# Altium PCB PCB1.PcbDoc
Units mm, origin at the board's own origin, x right, y up, seen from the top; angles counter-clockwise.
Board outline 60 x 80 mm, 2 copper layers (Top Layer, Bottom Layer), stack 1.569 mm thick; 48 components, 28 nets, 168 pads, 605 vias.
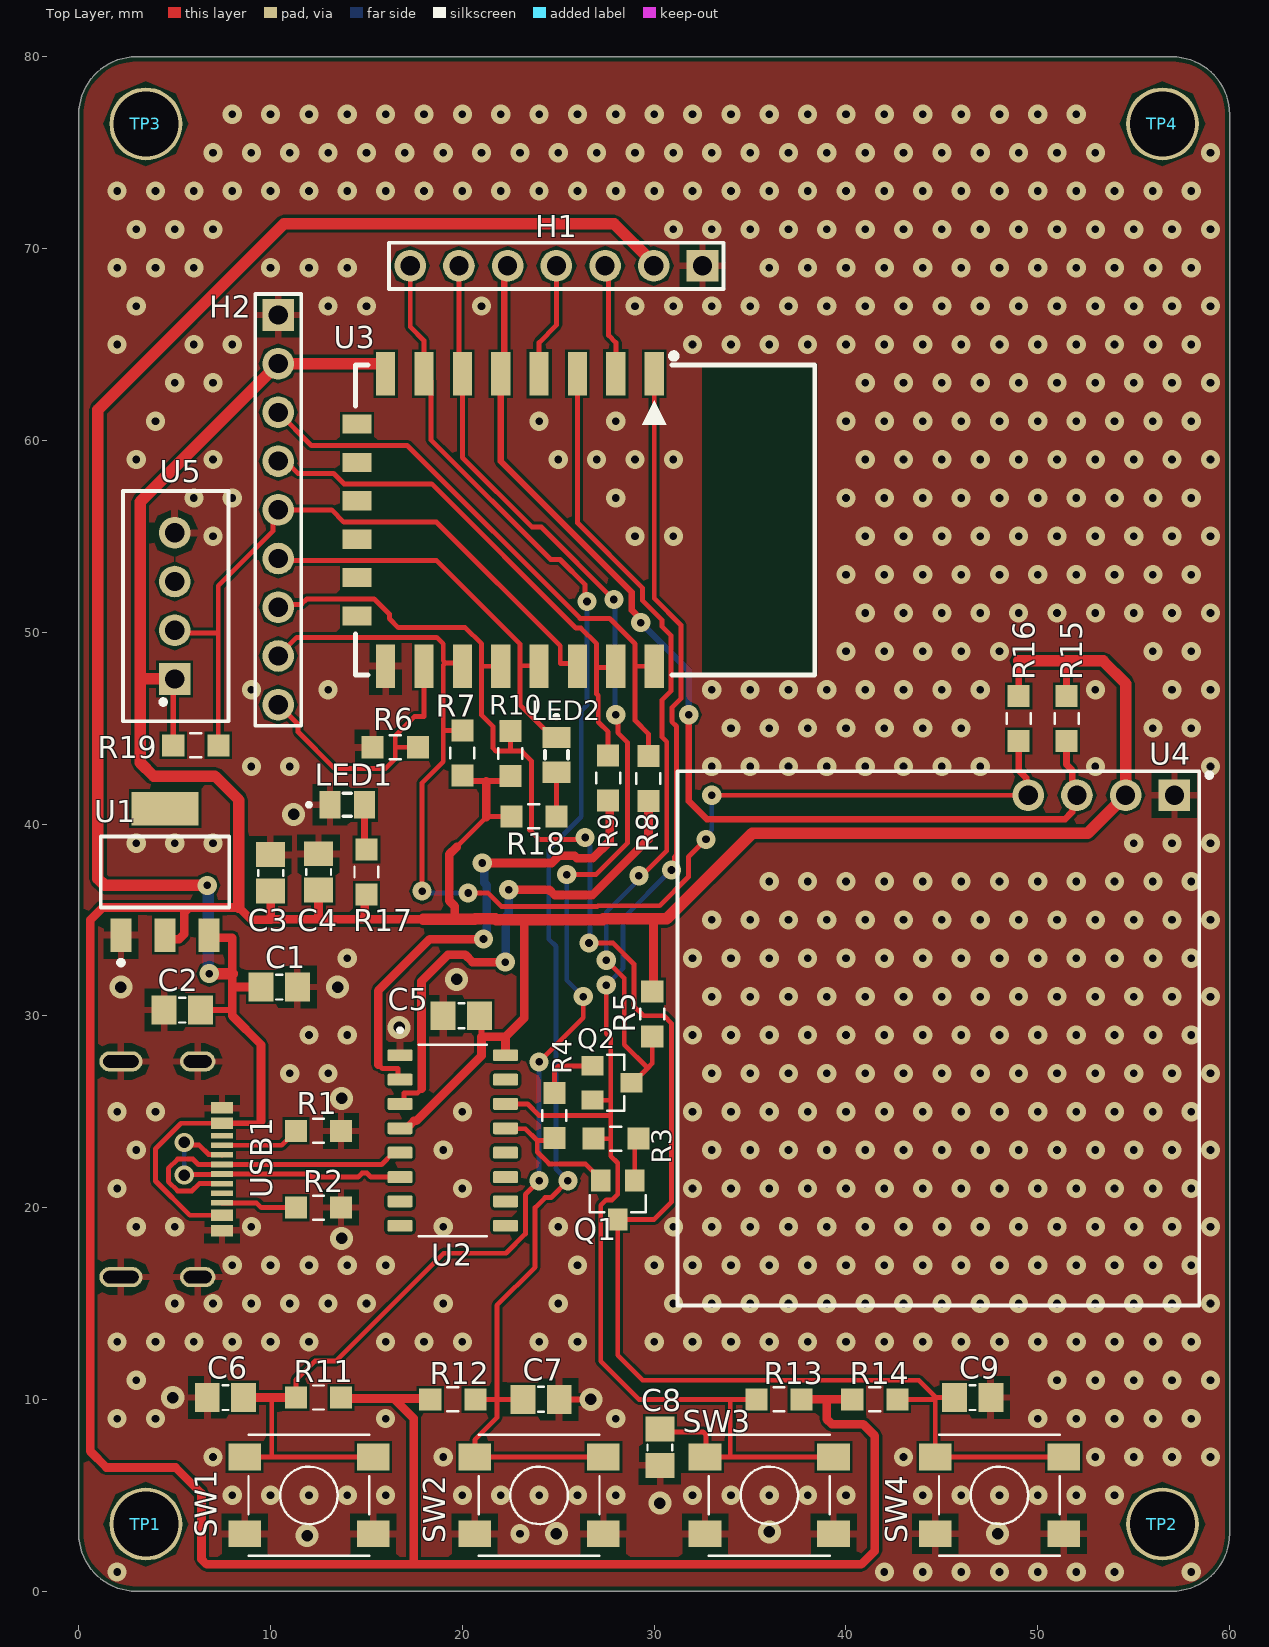
[diagram p0: Top Layer view]
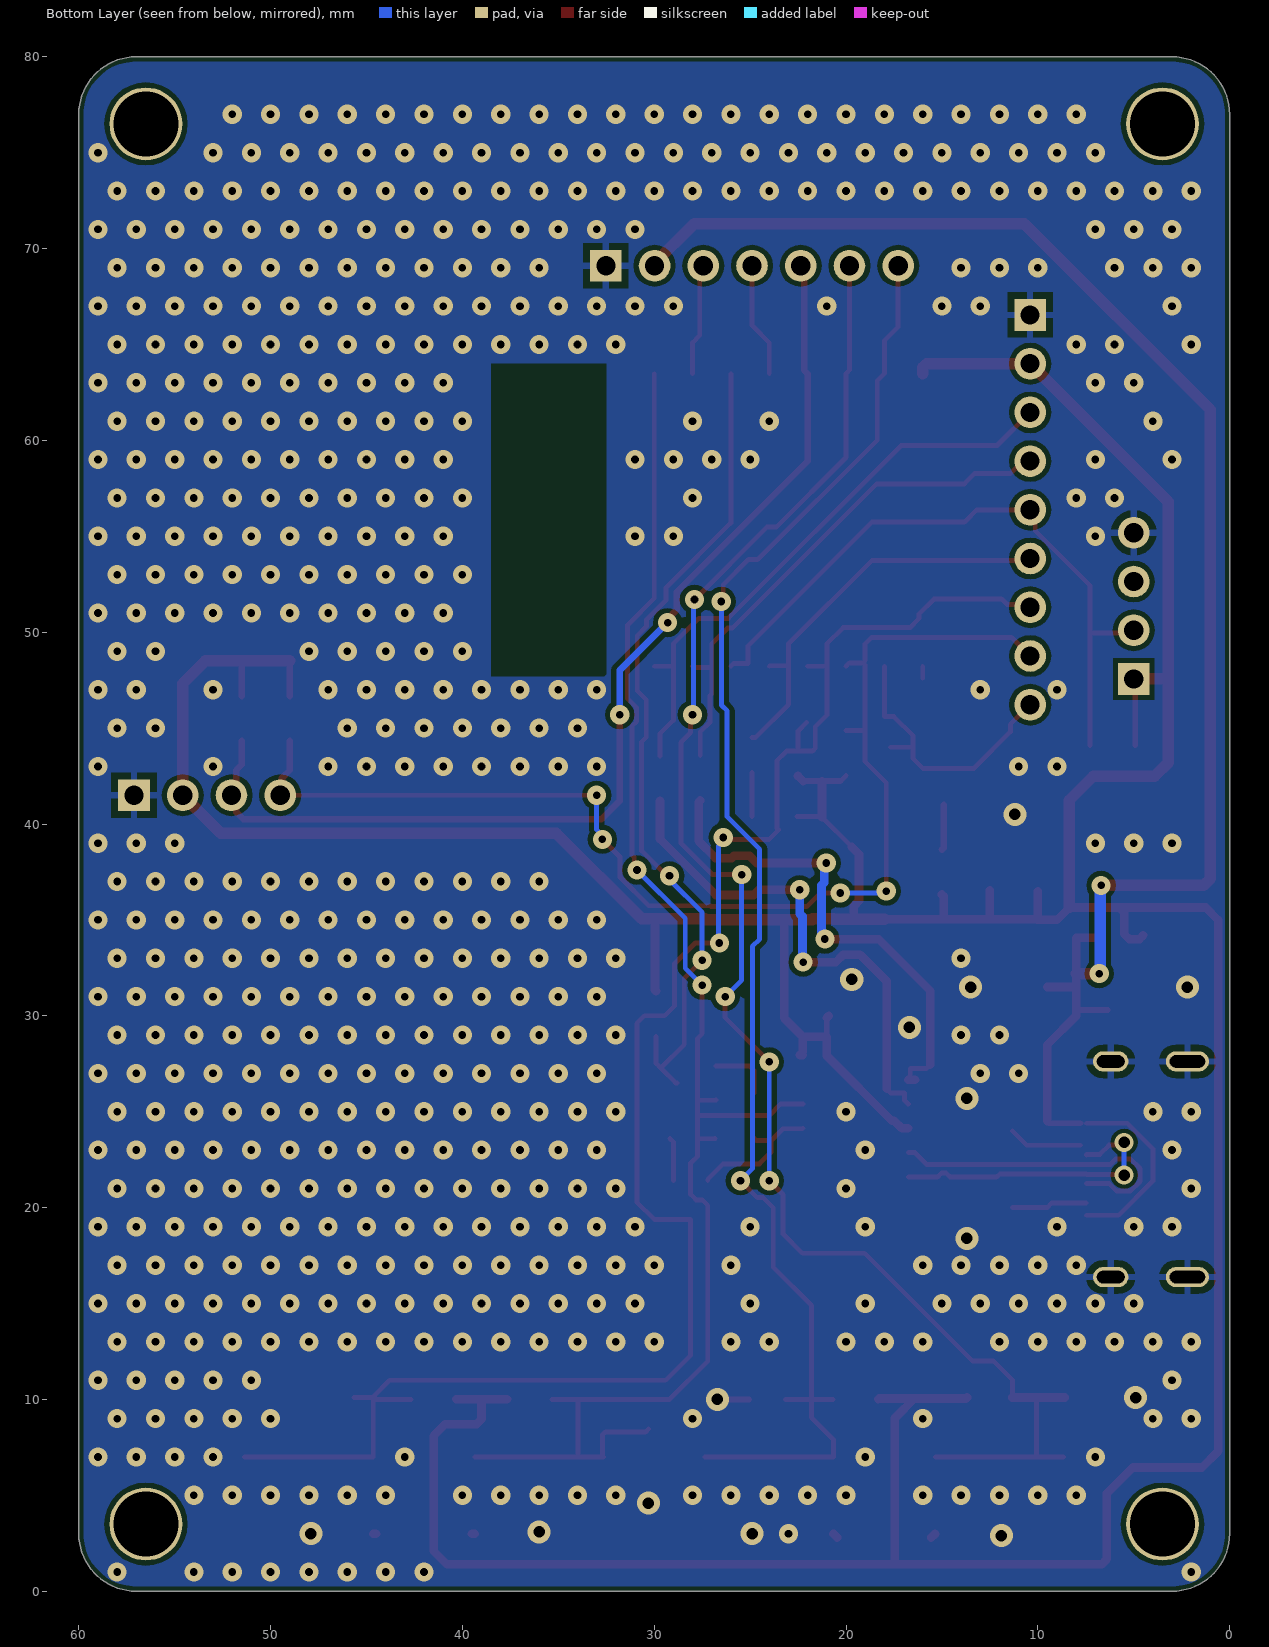
[diagram p1: Bottom Layer view, seen from below]

## Layer stack, top to bottom
Top Solder: solder mask 0.0254, SM-001, Dk 4
Top Layer: signal copper 0.035
Dielectric 1: core 1.4986, Core-043, Dk 4.3
Bottom Layer: signal copper 0.035
Bottom Solder: solder mask 0.0254, SM-001, Dk 4

## Board outline
0,3 ccw(c3,3) 3,0 57,0 ccw(c57,3) 60,3 60,77 ccw(c57,77) 57,80 3,80 ccw(c3,77) 0,77

## Design rules (kind name [scope] priority, off if disabled: settings)
AcuteAngle [All] p1: minimum=3.50000000000000E+0001 checktracksonly=FALSE
BoardOutlineClearance "BoardOutlineClearance 1" [All] p1: gap=0.25 ignorepadtopadclearanceinfootprint=FALSE except(0: Arc-SplitContinuation Track-SplitContinuation SMDPad-SplitContinuation THPad-SplitContinuation Via-SplitContinuation Fill-SplitContinuation Poly-SplitContinuation Region-SplitContinuation Text-SplitContinuation) // Milling
BoardOutlineClearance "BoardOutlineClearance 2" [All] p2: gap=0.4 ignorepadtopadclearanceinfootprint=FALSE except(0: Arc-SplitContinuation Track-SplitContinuation SMDPad-SplitContinuation THPad-SplitContinuation Via-SplitContinuation Fill-SplitContinuation Poly-SplitContinuation Region-SplitContinuation Text-SplitContinuation) // V-Cut
Clearance Room_USB [All] p1: gap=0.15 ignorepadtopadclearanceinfootprint=FALSE
Clearance "USB local clearances" [(InNet('NetR1_2') OR InNet('USB_D-') OR InNet('USB_D+') OR InNet('NetR6_2'))] p2 off: gap=0.2 ignorepadtopadclearanceinfootprint=TRUE
Clearance "Clearance 3 Oz" [All] p3 off: gap=0.35 ignorepadtopadclearanceinfootprint=TRUE except(0.25: Arc-Hole Track-Hole SMDPad-Hole THPad-Hole Via-Hole Fill-Hole Poly-Hole Region-Hole Text-Hole)
Clearance "Clearance 2 Oz" [All] p4 off: gap=0.3 ignorepadtopadclearanceinfootprint=TRUE except(0.25: Arc-Hole Track-Hole SMDPad-Hole THPad-Hole Via-Hole Fill-Hole Poly-Hole Region-Hole Text-Hole)
Clearance "Clearance-1 1 Oz" [All] p5: gap=0.254 ignorepadtopadclearanceinfootprint=TRUE // Standart
Clearance "Clearance-2 1 Oz" [All] p6 off: gap=0.15 ignorepadtopadclearanceinfootprint=TRUE except(0.2: Arc-Fill Arc-Poly Track-Fill Track-Poly SMDPad-Fill SMDPad-Poly THPad-Fill THPad-Poly Via-Fill Via-Poly Fill-Fill Fill-Poly Poly-Poly; 0.25: Arc-Hole Track-Hole SMDPad-Hole THPad-Hole Via-Hole Fill-Hole Poly-Hole Region-Hole Text-Hole) // Advance
Clearance "Clearance-1 1/2 Oz" [All] p7 off: gap=0.125 ignorepadtopadclearanceinfootprint=FALSE except(0.2: Arc-Fill Arc-Poly Track-Fill Track-Poly SMDPad-SMDPad SMDPad-Fill SMDPad-Poly THPad-Fill THPad-Poly Via-Fill Via-Poly Fill-Fill Fill-Poly Poly-Poly Poly-Region Poly-Text; 0.25: Arc-Hole Track-Hole SMDPad-Hole THPad-Hole Via-Hole Fill-Hole Poly-Hole Region-Hole Text-Hole) // Standart
Clearance "Clearance-2 1/2 Oz" [All] p8 off: gap=0.1 ignorepadtopadclearanceinfootprint=FALSE except(0.15: Arc-Fill Arc-Poly Track-Fill Track-Poly SMDPad-SMDPad SMDPad-Fill SMDPad-Poly THPad-Fill THPad-Poly Via-Fill Via-Poly Fill-Fill Fill-Poly Poly-Poly Poly-Region Poly-Text; 0.25: Arc-Hole Track-Hole SMDPad-Hole THPad-Hole Via-Hole Fill-Hole Poly-Hole Region-Hole Text-Hole) // Advance
DiffPairsRouting "DiffPairsRouting 1 Oz" [All] p1: maxlimit=0.254 minlimit=0.2 mostfreqgap=0.254 toplayer_minwidth=0.2 toplayer_maxwidth=0.381 toplayer_prefwidth=0.381 bottomlayer_minwidth=0.2 bottomlayer_maxwidth=0.381 bottomlayer_prefwidth=0.381 maxuncoupledlength=12.7
DiffPairsRouting "DiffPairsRouting 1/2 Oz" [All] p2: maxlimit=0.254 minlimit=0.1 mostfreqgap=0.254 toplayer_minwidth=0.1 toplayer_maxwidth=0.381 toplayer_prefwidth=0.381 bottomlayer_minwidth=0.1 bottomlayer_maxwidth=0.381 bottomlayer_prefwidth=0.381 maxuncoupledlength=12.7
HoleSize "Minimum HoleSize" [IsPad] p1: absolutevalues=TRUE maxlimit=5.9 minlimit=0.6 maxpercent=80.000 minpercent=20.000
HoleSize "Minimum HoleSize VIA 1" [IsVia] p2: absolutevalues=TRUE maxlimit=5.9 minlimit=0.3 maxpercent=80.000 minpercent=20.000 // Standart
HoleSize "Minimum HoleSize VIA 2" [IsVia] p3: absolutevalues=TRUE maxlimit=5.9 minlimit=0.2 maxpercent=80.000 minpercent=20.000 // Advance
HoleToHoleClearance Hole2HoleClearance [All] p1: gap=0.25 allowstackedmicrovias=FALSE
MinimumAnnularRing "Minimum AR VIA Standart" [IsVia] p1: minimumring=0.15
MinimumAnnularRing "Minimum AR PAD Standart" [IsPAD] p2: minimumring=0.2
MinimumAnnularRing "Minimum AR VIA Advance" [IsVia] p3: minimumring=0.1
MinimumAnnularRing "Minimum AR PAD Advance" [IsPAD] p4: minimumring=0.15
MinimumSolderMaskSliver [HasFootprint('TE_2340901-1')] p1: minsoldermaskwidth=0.05
MinimumSolderMaskSliver "SolderMask Bridge Standart" [All] p2: minsoldermaskwidth=0.15 // All Masks
MinimumSolderMaskSliver "SolderMask Bridge Advance" [All] p3: minsoldermaskwidth=0.1 // Mask LDI
PlaneClearance "PlaneClearance 3 Oz" [All] p1: clearance=0.35
PlaneClearance "PlaneClearance 2 Oz" [All] p2: clearance=0.3
PlaneClearance "PlaneClearance 1 Oz" [All] p3: clearance=0.2
PlaneClearance "PlaneClearance-1 1/2 Oz" [All] p4: clearance=0.2 // Standart
PlaneClearance "PlaneClearance-2 1/2 Oz" [All] p5: clearance=0.15 // Advance
PlaneConnect "TermalConnect 3 Oz" [All] p1: planeconnectstyle=Relief reliefexpansion=0.2 reliefentries=4 reliefconductorwidth=0.35 reliefairgap=0.35 // Standart
PlaneConnect "TermalConnect 2 Oz" [All] p2: planeconnectstyle=Relief reliefexpansion=0.2 reliefentries=4 reliefconductorwidth=0.3 reliefairgap=0.3 // Standart
PlaneConnect "TermalConnect-1 1 Oz" [All] p3: planeconnectstyle=Relief reliefexpansion=0.2 reliefentries=4 reliefconductorwidth=0.2 reliefairgap=0.2 // Standart
PlaneConnect "TermalConnect-2 1 Oz" [All] p4: pad.planeconnectstyle=Relief pad.reliefexpansion=0.15 pad.reliefentries=4 pad.reliefconductorwidth=0.2 pad.reliefairgap=0.2 via.planeconnectstyle=Direct via.reliefexpansion=0.15 via.reliefentries=4 via.reliefconductorwidth=0.15 via.reliefairgap=0.15 // Advance
PlaneConnect "TermalConnect-1 1/2 Oz" [All] p5: planeconnectstyle=Relief reliefexpansion=0.2 reliefentries=4 reliefconductorwidth=0.2 reliefairgap=0.2 // Standart
PlaneConnect "TermalConnect-2 1/2 Oz" [All] p6: pad.planeconnectstyle=Relief pad.reliefexpansion=0.15 pad.reliefentries=4 pad.reliefconductorwidth=0.15 pad.reliefairgap=0.15 via.planeconnectstyle=Direct via.reliefexpansion=0.15 via.reliefentries=4 via.reliefconductorwidth=0.15 via.reliefairgap=0.15 // Advance
PolygonConnect "PolygonConnect 3 Oz" [All] p1: thpad.connectstyle=Relief thpad.reliefconductorwidth=0.35 thpad.reliefentries=4 thpad.polygonreliefangle="90 Angle" thpad.airgapwidth=0.35 smdpad.connectstyle=Relief smdpad.reliefconductorwidth=0.35 smdpad.reliefentries=4 smdpad.polygonreliefangle="90 Angle" smdpad.airgapwidth=0.35 via.connectstyle=Direct via.reliefconductorwidth=0.254 via.reliefentries=4 via.polygonreliefangle="90 Angle" via.airgapwidth=0.254
PolygonConnect "PolygonConnect 2 Oz" [All] p2: thpad.connectstyle=Relief thpad.reliefconductorwidth=0.3 thpad.reliefentries=4 thpad.polygonreliefangle="90 Angle" thpad.airgapwidth=0.3 smdpad.connectstyle=Relief smdpad.reliefconductorwidth=0.3 smdpad.reliefentries=4 smdpad.polygonreliefangle="90 Angle" smdpad.airgapwidth=0.3 via.connectstyle=Direct via.reliefconductorwidth=0.254 via.reliefentries=4 via.polygonreliefangle="90 Angle" via.airgapwidth=0.254
PolygonConnect "PolygonConnect-1 1 Oz" [All] p3: thpad.connectstyle=Relief thpad.reliefconductorwidth=0.2 thpad.reliefentries=4 thpad.polygonreliefangle="90 Angle" thpad.airgapwidth=0.2 smdpad.connectstyle=Relief smdpad.reliefconductorwidth=0.2 smdpad.reliefentries=4 smdpad.polygonreliefangle="90 Angle" smdpad.airgapwidth=0.2 via.connectstyle=Direct via.reliefconductorwidth=0.254 via.reliefentries=4 via.polygonreliefangle="90 Angle" via.airgapwidth=0.254 // Standart
PolygonConnect "PolygonConnect-2 1 Oz" [All] p4: thpad.connectstyle=Relief thpad.reliefconductorwidth=0.15 thpad.reliefentries=4 thpad.polygonreliefangle="90 Angle" thpad.airgapwidth=0.15 smdpad.connectstyle=Relief smdpad.reliefconductorwidth=0.15 smdpad.reliefentries=4 smdpad.polygonreliefangle="90 Angle" smdpad.airgapwidth=0.15 via.connectstyle=Direct via.reliefconductorwidth=0.254 via.reliefentries=4 via.polygonreliefangle="90 Angle" via.airgapwidth=0.254 // Advance
PolygonConnect "PolygonConnect-1 1/2 Oz" [All] p5: thpad.connectstyle=Relief thpad.reliefconductorwidth=0.15 thpad.reliefentries=4 thpad.polygonreliefangle="90 Angle" thpad.airgapwidth=0.2 smdpad.connectstyle=Relief smdpad.reliefconductorwidth=0.2 smdpad.reliefentries=4 smdpad.polygonreliefangle="90 Angle" smdpad.airgapwidth=0.2 via.connectstyle=Direct via.reliefconductorwidth=0.254 via.reliefentries=4 via.polygonreliefangle="90 Angle" via.airgapwidth=0.254 // Standart
PolygonConnect "PolygonConnect-2 1/2 Oz" [All] p6: thpad.connectstyle=Relief thpad.reliefconductorwidth=0.125 thpad.reliefentries=4 thpad.polygonreliefangle="90 Angle" thpad.airgapwidth=0.15 smdpad.connectstyle=Relief smdpad.reliefconductorwidth=0.125 smdpad.reliefentries=4 smdpad.polygonreliefangle="90 Angle" smdpad.airgapwidth=0.15 via.connectstyle=Direct via.reliefconductorwidth=0.254 via.reliefentries=4 via.polygonreliefangle="90 Angle" via.airgapwidth=0.254 // Advance
RoomDefinition R_USB_conn [All vs False] p1: confinementstyle=ConfineOut formatcopy=TRUE lockcomponents=FALSE outline 8.4,25.9 5.7,25.9 5.7,24.7 4.6,23.6 4.2,23.6 4.2,20.7 5.5,19.4 5.6,19.4 5.6,18.7 6.2,18.1 8.5,18.1 8.4,18.2 8.4,26
RoutingCorners [All] p1 off: cornerstyle=45-Degree minsetback=2.54 maxsetback=2.54
RoutingVias [All] p1: holewidth=0.6 width=1 viastyle="Through Hole" minholewidth=0.4 minwidth=0.7 maxholewidth=0.7 maxwidth=1.27
SilkToSilkClearance Silk2SilkClearance [All] p1 off: silktosilkclearance=0.15
SilkToSolderMaskClearance Silk2SolderMaskClearance [IsPad] p1 off: minsilkscreentomaskgap=0.15 clearancetoexposedcopper=TRUE
SolderMaskExpansion SolderMaskExpansion-1 [All] p1: expansion=0.05 istentingtop=FALSE // Standart
SolderMaskExpansion "SolderMaskExpansion LDI" [All] p2: expansion=0.025 istentingtop=FALSE // Advance
UnRoutedNet [All] p1: checkbadconnections=TRUE
Width "Width 2 Oz" [InNet('+3V3')] p1 off: maxlimit=1 minlimit=0.254 preferedwidth=0.45 minimp=50.000000 maximp=50.000000 favimp=50.000000 checkconnectedcopper=TRUE
Width "Width 3 Oz" [All] p2: maxlimit=1 minlimit=0.254 preferedwidth=0.35 minimp=50.000000 maximp=50.000000 favimp=50.000000 checkconnectedcopper=TRUE
Width "Width 1 Oz" [All] p3 off: maxlimit=10 minlimit=0.15 preferedwidth=0.2 checkconnectedcopper=TRUE
Width "Width 1/2 Oz" [All] p4 off: maxlimit=10 minlimit=0.1 preferedwidth=0.125 checkconnectedcopper=TRUE
20 further rules are at their usual default settings.

## Components (designator, comment, footprint, x,y, rotation, side; value= is the part's Value field where it differs from the comment)
C1 "10 uF" CAPC2012X135N 10.45,31.5 r0 top
C2 "0.1 uF" "CAPC2012X135N - duplicate" 5.4,30.3 r180 top
C3 "10 uF" CAPC2012X135N 10,37.45 r90 top
C4 "0.1 uF" "CAPC2012X135N - duplicate" 12.5,37.5 r90 top
C5 "0.1 uF" "CAPC2012X135N - duplicate" 19.95,30 r180 top
C6 "0.1 uF" "CAPC2012X135N - duplicate" 7.65,10.1 r180 top
C7 "0.1 uF" "CAPC2012X135N - duplicate" 24.1,10 r0 top
C8 "0.1 uF" "CAPC2012X135N - duplicate" 30.3,7.5 r270 top
C9 "0.1 uF" "CAPC2012X135N - duplicate" 46.6,10.1 r0 top
H1 "HDR 07" "HDR 07" 32.52,69.1 r180 top
H2 "HDR 09" "HDR 09" 10.4,66.54 r270 top
LED1 "Red" LEDC2012X70N 14,41 r0 top
LED2 "Green" LEDC2012X70N 24.9,43.6 r270 top
Q1 "S8050" SOT-23 28.1,20.4 r180 top
Q2 "S8050" SOT-23 27.8,26.5 r270 top
R1 "5.1k 5%" R0805 12.5,24 r180 top value=5.1K
R2 "5.1k 5%" R0805 12.5,20 r180 top value=5.1K
R3 "10k 5%" R0805 28,23.6 r0 top value=5.1K
R4 "10k 5%" R0805 24.8,24.8 r90 top value=5.1K
R5 "10k 5%" R0805 29.9,30.1 r90 top value=5.1K
R6 "10k" R0805 16.5,44 r0 top value=5.1K
R7 "10k" R0805 20,43.7 r90 top value=5.1K
R8 "300" R0805 29.7,42.375 r270 top
R9 "300" R0805 27.6,42.4 r270 top
R10 "10k" R0805 22.5,43.675 r90 top value=5.1K
R11 "10k 5%" R0805 12.5,10.1 r0 top value=5.1K
R12 "10k 5%" R0805 19.5,10 r180 top value=5.1K
R13 "10k 5%" R0805 36.5,10 r0 top value=5.1K
R14 "10k 5%" R0805 41.5,10 r180 top value=5.1K
R15 "4.7k" R0805 51.5,45.5 r90 top value=4.7K
R16 "4.7k" R0805 49,45.5 r90 top value=4.7K
R17 "470" R0805 15,37.5 r90 top
R18 "470" R0805 23.725,40.4 r0 top
R19 "4.7k" R0805 6.1,44.1 r180 top value=4.7K
SW1 "Tack switch" 430453025836 12,5 r180 top locked
SW2 "Tack switch" 430453025836 24,5 r180 top locked
SW3 "Tack switch" 430453025836 36,5 r180 top locked
SW4 "Tack switch" 430453025836 48,5 r180 top locked
TP1 "MH M3" MH_M3#1 65,-3 r0 top
TP2 "MH M3" MH_M3#2 55,2.5 r0 top
TP3 "MH M3" MH_M3#3 76,-3 r0 top
TP4 "MH M3" MH_M3#4 82,-3 r0 top
U1 "BL1117-33CX" SOT-223-2 4.5,37.5 r0 top
U2 "CH340C" SOIC127P600X180-16N 19.5,23.5 r0 top
U3 "ESP_12_F" ESP_12_F 30,63.85 r270 top locked
U4 "0.96' OLED" "0.96 OLED_temp" 57.12,41.5 r180 top locked
U5 "DHT11" DHT11 5,47.56 r90 top
USB1 "Type-C Conn" TE_2340901-1 2.2,22 r270 top

## Footprints (in the part's own frame and the unit in brackets; to place one, negate y for a bottom-side part, rotate by r counter-clockwise, add the part's x,y. Pads: shape width x height; smd on the part's side, far side on the other; paste and mask are expansions set on the pad)
"0.96 OLED_temp" [mm] "Some virtual OLED module"
  rect 1.65x1.65 hole 1 mask+0: 1(0,0)
  round 1.65 hole 1 mask+0: 2(2.54,0) 3(5.08,0) 4(7.62,0)
  silkscreen extent -1.94,-1.25 25.9,26.6
430453025836 [mm] "6*6mm washable vertical type, J-Bend SMD, height 2.5mm, salmon actuator, 360gf, T&R"
  rect 1.7x1.4 smd: 1(-3.35,2) 2(3.35,2) 3(-3.35,-2) 4(3.35,-2)
  silkscreen extent -3.15,-3.15 3.15,3.15, body extent -3.6,-3.1 3.6,3.1, height 2.5
CAPC2012X135N [mm]
  rect 1.3x1.5 smd: 1(-0.95,0) 2(0.95,0)
  silkscreen extent -0.15,-0.65 0.15,0.65, body extent -1,-0.63 1,0.63, height 0.72
"CAPC2012X135N - duplicate" [mm]
  rect 1.3x1.5 smd: 1(-0.95,0) 2(0.95,0)
  silkscreen extent -0.15,-0.65 0.15,0.65
DHT11 [mm] "Temp and humidity module"
  rect 1.65x1.65 hole 1 mask+0: 1(0,0)
  round 1.65 hole 1 mask+0: 2(2.54,0) 3(5.08,0) 4(7.62,0)
  silkscreen extent -2.2,-2.8 9.8,2.7
ESP_12_F [mm] "ESP-12 Wi-Fi Module by AI-Thinker"
  rect 2.25x1 smd: 1(0.375,0) 2(0.375,-2) 3(0.375,-4) 4(0.375,-6) 5(0.375,-8) 6(0.375,-10) 7(0.375,-12) 8(0.375,-14) 9(15.625,-14) 10(15.625,-12) 11(15.625,-10) 12(15.625,-8) 13(15.625,-6) 14(15.625,-4) 15(15.625,-2) 16(15.625,0)
  rect 1x1.5 smd: 17(3,-15.5) 18(5,-15.5) 19(7,-15.5) 20(9,-15.5) 21(11,-15.5) 22(13,-15.5)
  silkscreen extent -0.7,-15.57 16.08,8.37, body extent 0,-15.49 16,8.51, height 2.75
"HDR 07" [mm]
  rect 1.65x1.65 hole 1: 1(0,0)
  round 1.65 hole 1: 2(2.54,0) 3(5.08,0) 4(7.62,0) 5(10.16,0) 6(12.7,0) 7(15.24,0)
  silkscreen extent -1.1,-1.2 16.34,1.2
"HDR 09" [mm]
  rect 1.65x1.65 hole 1: 1(0,0)
  round 1.65 hole 1: 2(2.54,0) 3(5.08,0) 4(7.62,0) 5(10.16,0) 6(12.7,0) 7(15.24,0) 8(17.78,0) 9(20.32,0)
  silkscreen extent -1.1,-1.2 21.42,1.2
LEDC2012X70N [mm]
  rect 1.1x1.45 smd: A(0.9,0) C(-0.9,0)
  silkscreen extent -2.1,-0.6 0.2,0.6, body extent -1,-0.63 1,0.63, height 0.7
MH_M3#1 [mm] "Mounting hole for M3 screw"
  round 3.8 hole 3.4 unplated: TP(-61.5,6.5)
MH_M3#2 [mm] "Mounting hole for M3 screw"
  round 3.8 hole 3.4 unplated: TP(1.5,1)
MH_M3#3 [mm] "Mounting hole for M3 screw"
  round 3.8 hole 3.4 unplated: TP(-72.5,79.5)
MH_M3#4 [mm] "Mounting hole for M3 screw"
  round 3.8 hole 3.4 unplated: TP(-25.5,79.5)
R0805 [mm]
  rect 1.15x1.15 smd: 1(-1.175,0) 2(1.175,0)
  silkscreen extent -0.28,-0.63 0.28,0.63
SOIC127P600X180-16N [mm]
  rrect25% 1.31x0.62 smd: 1(-2.75,4.445) 2(-2.75,3.175) 3(-2.75,1.905) 4(-2.75,0.635) 5(-2.75,-0.635) 6(-2.75,-1.905) 7(-2.75,-3.175) 8(-2.75,-4.445) 9(2.75,-4.445) 10(2.75,-3.175) 11(2.75,-1.905) 12(2.75,-0.635) 13(2.75,0.635) 14(2.75,1.905) 15(2.75,3.175) 16(2.75,4.445)
  silkscreen extent -2.85,-5 1.78,5.85, body extent -3,-5 3,5, height 1.8
SOT-23 [mil]
  rect 40x45 smd: 1(-35,-40) 2(35,-40) 3(0,40)
  silkscreen extent -58,-10 58,25, body extent -57,-51 57,51, height 55
SOT-223-2 [mm] "SOT-223/SC-73; 4 Leads; Body 6.7 x 7.3 mm, inc. leads (LxW max)"
  rect 1.1x1.75 smd: 1(-2.3,-3.3) 2(0,-3.3) 3(2.3,-3.3)
  rect 3.5x1.75 smd: 4(0,3.3)
  silkscreen extent -3.35,-4.85 3.35,1.85, body extent -3.35,-3.7 3.35,3.5, height 1.85
TE_2340901-1 [mm]
  rect 0.6x1.15 smd: A1/B12(-3.2,5.275) A4/B9(-2.4,5.275) B1/A12(3.2,5.275) B4/AP(2.4,5.275)
  rect 0.3x1.15 smd: A5(-1.25,5.275) A6(-0.25,5.275) A7(0.25,5.275) A8(1.25,5.275) B5(1.75,5.275) B6(0.75,5.275) B7(-0.75,5.275) B8(-1.75,5.275)
  oval 1.05x1.85 hole 0.65 slot 1.45 at 90 deg: SH1(-5.62,4) SH2(5.62,4)
  oval 1.05x2.25 hole 0.65 slot 1.85 at 90 deg: SH3(-5.62,0) SH4(5.62,0)

## Part data
C1 C3: library part GRT21BR61C106KE01L, "SMD Capacitor X5R(EIA) with Capacitance: 10uF Tol. 10%. Rated Voltage: 16Vdc", Package="0805 Murata", Availability=Good, MF=Murata, MP=GRT21BR61C106KE01L, Price=None
C2 C4 C5 C6 C7 C8 C9: library part GCM21BR71H104KA37K, "SMD Capacitor X7R(EIA) with Capacitance: 0.10uF Tol. 10%. Rated Voltage: 50Vdc", Package="0805 Murata", MF=Murata, MP=GCM21BR71H104KA37K
H1: "TE conn, HDR 7 Assy, MOD II, TH 2.54 mm"
H2: "TE conn, HDR 9 Assy, MOD II, TH 2.54 mm"
LED1 LED2: library part 597-5111-402F, "SMD LED 0805 R SAMPLE STRIP"
Q1 Q2: library part SMD-TRANSISTORS-NPN-25V-500MW(SOT-23), "Bipolar (BJT) Transistor NPN 25 V 500 mA 150MHz 300 mW Surface Mount SOT-23", MF=UMW, MP=S8050
R1 R2: library part "R 5.1k 5%", Package=0805, Availability=Unavailable, Price=None
R3 R4 R5 R11 R12 R13 R14: Package=0805, Availability=Unavailable, Price=None
R6 R7 R10: library part "10k 5%", Package=0805, Availability=Unavailable, Price=None
R8 R9 R17 R18: "5%", Package=0805, Availability=Unavailable, Price=None
R15 R16 R19: library part "4.7k 5%", Package=0805, Availability=Unavailable, Price=None
SW1 SW2 SW3 SW4: "WS-TASV J-Bend SMD Tact Switch 6X6 mm", NoPins=04
TP1 TP2 TP3 TP4: "Mounting hole"
U1: library part BL1117-18CX
U2: "USB to serial chip CH340"
U3: "ESP-12F Wi-Fi Module by AI-Thinker"
U4: library part "0.96 OLED_temp"
USB1: "USB Type C 2.0 Conn"

## Via types
v1: diameter 1, hole 0.4, Top Layer to Bottom Layer, 589 vias
v2: diameter 1.2, hole 0.6, Top Layer to Bottom Layer, 14 vias
v3: diameter 1, hole 0.6, Top Layer to Bottom Layer, 2 vias

## Nets (pads, with @x,y where several pads share a name; then routed paths per layer and width w, separated by ;. In a path a pad name is that pad's centre, name@x,y a point inside that pad or via, vN(x,y) a via of type N, cw(c..) or ccw(c..) an arc to the next point about the centre after c; other vN are vias at no path point)
+3V3: C3.1 C4.1 C5.1 H2.2 R5.2 R7.1 R10.1 R11.2 R12.2 R13.2 R14.2 R15.2 R16.2 R17.1 R18.1 R19.2 U1.2 U2.4 U2.16 U3.8 U4.2 U5.1 | length 259.1
  Top Layer w0.254: 19.7,38.804 21.25,40.354 21.296,40.4 R18.1 ; R7.1 R7.1@20.289,42.236
  Top Layer w0.3: R19.2 4.925,47.485 U5.1 ; R7.1@20.289,42.236 21.25,42.236 R10.1@22.236,42.236 ; 21,28.911 C5.1@21,29.9
  Top Layer w0.35: R16.2 49,48.5 ; 51.47,48.5 51.5,48.47 R15.2
  Top Layer w0.45: U1.2 4.7,34 5.236,34 5.5,34.264 5.5,35.386 5.764,35.65 ; C3.1 10,35.029 ; C4.1 12.5,35.098 12.569,35.029 ; R11.2 13.725,10.05 16.426,10.05 ; R17.1 14.907,36.232 14.907,35.029 ; U2.4 17.095,24.135 17.48,24.52 17.598,24.52 21,27.922 21,28.911 22.25,28.911 ; 17.971,35.029 14.907,35.029 ; R12.2 18.275,10.05 16.426,10.05 ; 19.599,35.029 19.599,35.717 19.321,35.994 19.321,38.425 19.7,38.804 ; C5.1 C5.1@21,29.9 ; 21.25,40.354 21.25,42.236 ; R10.1@22.236,42.236 R10.1 ; U2.16 22.415,27.945 22.25,28.11 22.25,28.911 ; 23.19,35.013 23.204,35.013 23.218,35.027 23.218,29.879 22.25,28.911 ; R5.2 29.961,31.336 29.961,35.054 ; R13.2 39,10 ; R14.2 39,10 ; 5.764,35.65 1.25,35.65 0.6,35 0.6,28.04 0.596,28.036 0.596,7.3 1.446,6.45 5.05,6.45 6.4,5.1 6.4,1.664 6.664,1.4 17.457,1.4 ; 5.764,35.65 8.35,35.65 9,35 10.029,35 10,35.029 ; 10,35.029 12.569,35.029 ; 12.569,35.029 14.907,35.029 ; 16.426,10.05 17.457,9.019 17.457,1.4 ; 17.457,1.4 40.8,1.4 41.5,2.1 41.5,8.1 40.9,8.7 39.264,8.7 39,8.964 39,10
  Top Layer w0.6: U5.1 3.271,47.56 3.2,47.489 ; 8.35,35.65 8.35,41.25 7.1,42.5 3.9,42.5 3.2,43.2 3.2,47.489 ; U3.8 16,63.8 15.8,64 H2.2 3.2,56.8 3.2,47.489 ; 17.971,35.029 19.599,35.029 20.638,35.029 20.663,35.054 21.726,35.054 21.767,35.013 23.218,35.013 27.313,35.013 27.354,35.054 29.961,35.054 30.654,35.054 35.117,39.517 52.597,39.517 U4.2 54.58,47.32 53.4,48.5 51.47,48.5 49,48.5
+5: C1.1 C2.1 H1.2 U1.3 USB1.A4/B9 USB1.B4/AP | length 96.5
  Top Layer w0.254: USB1.B4/AP 5.788,19.6 4,21.388 4,23.07 5.33,24.4 USB1.A4/B9
  Top Layer w0.3: C2.1 7.872,30.3 8,30.428 ; USB1.A4/B9@7.775,24.4 9.4,24.4 9.5,24.5
  Top Layer w0.45: U1.3 6.8,34.061 8,34.061 8,32.204 8,31.5 ; 9.5,24.5 9.5,28.5 8,30 8,30.428 8,31.5 ; C1.1 8,31.5
  Top Layer w0.6: v1(6.7,36.8) 1.351,36.8 1,37.151 1,61.6 10.7,71.3 27.909,71.3 29.98,69.229 H1.2 ; v1(6.8,32.2) 6.804,32.204 8,32.204
  Bottom Layer w0.6: v1(6.7,36.8) 6.75,36.75 6.75,32.25 v1(6.8,32.2)
ADC: H1.3 U3.2 | length 5.9
  Top Layer w0.254: H1.3 27.627,68.913 27.627,65.473 28,65.1 U3.2
CH340_RXD: R8.2 U2.3 | length 26.8
  Top Layer w0.254: U2.3 16.766,25.405 16.949,25.588 16.949,25.984 17.674,25.984 17.884,26.194
  Top Layer w0.45: 17.884,26.194 17.884,28.565 17.871,28.578 17.871,31.797 19.253,33.179 20.147,33.179 20.526,32.8 v1(22.237,32.8) ; v1(22.414,36.575) 24.534,36.575 24.809,36.3 26.78,36.3 29.7,39.22 R8.2
  Bottom Layer w0.45: v1(22.237,32.8) 22.268,32.832 22.268,35.175 22.414,35.321 v1(22.414,36.575)
CH340_TXD: R9.2 U2.2 | length 26
  Top Layer w0.254: 15.616,27.464 15.826,27.254 16.651,27.254 16.651,26.774 U2.2
  Top Layer w0.45: 15.616,27.464 15.616,31.316 18.3,34 v1(21.1,34) ; U2.2@16.405,26.675 U2.2 ; v1(21.034,37.966) 24.661,37.966 25.034,38.339 25.845,38.339 25.963,38.221 26.805,38.221 27.679,39.094 27.679,41.146 R9.2
  Bottom Layer w0.45: v1(21.034,37.966) 21.139,37.861 21.139,36.945 21.279,36.806 21.279,34.328 21.1,34.149 v1(21.1,34)
DTR: Q1.2 R4.1 U2.13 | length 7.4
  Top Layer w0.254: U2.13 22.271,24.114 23.286,24.114 23.9,23.5 ; R4.1 24.675,23.5 23.9,23.5 ; Q1.2 27.211,21.479 26.409,22.281 24.519,22.281 23.9,22.9 23.9,23.5
GND: C1.2 C2.2 C3.2 C4.2 C5.2 C6.2 C7.2 C8.2 C9.2 H1.1 H2.1 LED1.C R1.1 R2.1 R6.1 SW1.1 SW1.2 SW2.1 SW2.2 SW3.1 SW3.2 SW4.1 SW4.2 U1.1 U2.1 U3.9 U4.1 U5.4 USB1.A1/B12 USB1.B1/A12 USB1.SH1 USB1.SH2 USB1.SH3 USB1.SH4 | length 3.1
  Top Layer w0.254: U3.9@16,47.6 U3.9
  Top Layer w0.3: C7.2 v2(26.7,10)
  Top Layer w0.45: SW1.1 SW1.1@15.55,2.8 ; SW2.2@20.45,2.8 SW2.2 ; SW3.1 SW3.1@39.5,3 ; SW4.2@44.5,3 SW4.2
  other v1: 2,1 42,1 44,1 46,1 48,1 50,1 52,1 54,1 58,1 23,3 8,5 10,5 12,5 14,5 16,5 20,5 22,5 24,5 26,5 28,5 32,5 34,5 36,5 38,5 40,5 44,5 46,5 48,5 50,5 52,5 54,5 7,7 19,7 43,7 53,7 55,7 57,7 59,7 2,9 4,9 16,9 28,9 50,9 52,9 54,9 56,9 58,9 3,11 51,11 53,11 55,11 57,11 59,11 2,13 4,13 6,13 8,13 10,13 12,13 16,13 18,13 20,13 24,13 26,13 30,13 32,13 34,13 36,13 38,13 40,13 42,13 44,13 46,13 48,13 50,13 52,13 54,13 56,13 58,13 5,15 7,15 9,15 11,15 13,15 15,15 19,15 25,15 31,15 33,15 35,15 37,15 39,15 41,15 43,15 45,15 47,15 49,15 51,15 53,15 55,15 57,15 59,15 8,17 10,17 12,17 14,17 16,17 26,17 30,17 32,17 34,17 36,17 38,17 40,17 42,17 44,17 46,17 48,17 50,17 52,17 54,17 56,17 58,17 3,19 5,19 9,19 19,19 25,19 31,19 33,19 35,19 37,19 39,19 41,19 43,19 45,19 47,19 49,19 51,19 53,19 55,19 57,19 59,19 2,21 20,21 32,21 34,21 36,21 38,21 40,21 42,21 44,21 46,21 48,21 50,21 52,21 54,21 56,21 58,21 3,23 19,23 33,23 35,23 37,23 39,23 41,23 43,23 45,23 47,23 49,23 51,23 53,23 55,23 57,23 59,23 2,25 4,25 20,25 32,25 34,25 36,25 38,25 40,25 42,25 44,25 46,25 48,25 50,25 52,25 54,25 56,25 58,25 11,27 13,27 33,27 35,27 37,27 39,27 41,27 43,27 45,27 47,27 49,27 51,27 53,27 55,27 57,27 59,27 12,29 14,29 32,29 34,29 36,29 38,29 40,29 42,29 44,29 46,29 48,29 50,29 52,29 54,29 56,29 58,29 33,31 35,31 37,31 39,31 41,31 43,31 45,31 47,31 49,31 51,31 53,31 55,31 57,31 59,31 14,33 32,33 34,33 36,33 38,33 40,33 42,33 44,33 46,33 48,33 50,33 52,33 54,33 56,33 58,33 33,35 35,35 37,35 39,35 41,35 43,35 45,35 47,35 49,35 51,35 53,35 55,35 57,35 59,35 36,37 38,37 40,37 42,37 44,37 46,37 48,37 50,37 52,37 54,37 56,37 58,37 3,39 5,39 7,39 55,39 57,39 59,39 9,43 11,43 33,43 35,43 37,43 39,43 41,43 43,43 45,43 47,43 53,43 59,43 34,45 36,45 38,45 40,45 42,45 44,45 46,45 56,45 58,45 9,47 13,47 33,47 35,47 37,47 39,47 41,47 43,47 45,47 47,47 53,47 57,47 59,47 40,49 42,49 44,49 46,49 48,49 56,49 58,49 41,51 43,51 45,51 47,51 49,51 51,51 53,51 55,51 57,51 59,51 40,53 42,53 44,53 46,53 48,53 50,53 52,53 54,53 56,53 58,53 7,55 29,55 31,55 41,55 43,55 45,55 47,55 49,55 51,55 53,55 55,55 57,55 59,55 6,57 8,57 28,57 40,57 42,57 44,57 46,57 48,57 50,57 52,57 54,57 56,57 58,57 3,59 7,59 25,59 27,59 29,59 31,59 41,59 43,59 45,59 47,59 49,59 51,59 53,59 55,59 57,59 59,59 4,61 24,61 28,61 40,61 42,61 44,61 46,61 48,61 50,61 52,61 54,61 56,61 58,61 5,63 7,63 41,63 43,63 45,63 47,63 49,63 51,63 53,63 55,63 57,63 59,63 2,65 6,65 8,65 32,65 34,65 36,65 38,65 40,65 42,65 44,65 46,65 48,65 50,65 52,65 54,65 56,65 58,65 3,67 13,67 15,67 21,67 29,67 31,67 33,67 35,67 37,67 39,67 41,67 43,67 45,67 47,67 49,67 51,67 53,67 55,67 57,67 59,67 2,69 4,69 6,69 10,69 12,69 14,69 36,69 38,69 40,69 42,69 44,69 46,69 48,69 50,69 52,69 54,69 56,69 58,69 3,71 5,71 7,71 31,71 33,71 35,71 37,71 39,71 41,71 43,71 45,71 47,71 49,71 51,71 53,71 55,71 57,71 59,71 2,73 4,73 6,73 8,73 10,73 12,73 14,73 16,73 18,73 20,73 22,73 24,73 26,73 28,73 30,73 32,73 34,73 36,73 38,73 40,73 42,73 44,73 46,73 48,73 50,73 52,73 54,73 56,73 58,73 7,75 9,75 11,75 13,75 15,75 17,75 19,75 21,75 23,75 25,75 27,75 29,75 31,75 33,75 35,75 37,75 39,75 41,75 43,75 45,75 47,75 49,75 51,75 53,75 59,75 8,77 10,77 12,77 14,77 16,77 18,77 20,77 22,77 24,77 26,77 28,77 30,77 32,77 34,77 36,77 38,77 40,77 42,77 44,77 46,77 48,77 50,77 52,77
  other v2: 11.9,2.9 24.9,3 47.9,3 36,3.1 30.3,4.6 4.9,10.1 13.7,18.4 13.7,25.7 16.7,29.4 2.2,31.5 13.5,31.5 19.7,31.9 11.2,40.5
GPIO0: C9.1 H2.7 Q1.3 R10.2 R14.1 SW4.3 SW4.4 U3.12 | length 92.1
  Top Layer w0.254: H2.7 10.547,51.447 11.606,51.447 11.89,51.731 15.408,51.731 16.2,50.939 16.2,50.7 16.661,50.239 20.15,50.239 21,49.389 21,48.223 ; U3.12 21.002,48.225 21,48.223 ; R10.2@22.052,45.298 R10.2 22.5,43.876 22.424,43.8 ; v1(26.4,39.3) 26.3,39.2 24,39.2 23.506,39.694 23.6,39.788 23.6,43.3 23.1,43.8 22.424,43.8 ; v1(26.6,33.8) 27.846,33.8 28.944,32.702 28.944,30.505 29.449,30 30.514,30 30.9,29.614 30.9,20.287 29.997,19.384 Q1.3 28.1,12.3 29.4,11 43.8,11 44.65,10.15 ; R14.1 44.5,10 44.65,10.15 ; C9.1 44.7,10.1 44.65,10.15 ; SW4.3 SW4.4 44.65,10.15 ; 21,48.223 21,45.675 21.6,45.075 21.6,43.949 21.749,43.8 22.424,43.8
  Bottom Layer w0.254: v1(26.4,39.3) 26.4,39.1 26.65,38.85 26.65,33.95 v1@26.7,33.9
GPIO2: H2.8 R7.2 R16.1 U3.11 U4.4 | length 63.7
  Top Layer w0.254: H2.8 11.371,49.731 18.658,49.731 19,49.389 19,48.519 19.119,48.4 ; v1(17.9,36.5) 17.9,42.147 19,43.247 19,44.845 ; R7.2 19.03,44.875 19,44.845 ; U3.11 19.825,48.4 19.119,48.4 ; v1(20.3,36.4) 21.343,36.4 22.049,35.694 27.031,35.694 27.072,35.735 30.281,35.735 31.781,37.235 31.781,38.281 v1(32.7,39.2) ; v1(33,41.5) U4.4 ; 19,44.845 19,48.281 19.119,48.4
  Top Layer w0.35: R16.1 49,42.8 49.4,42.4 49.4,41.6 U4.4
  Bottom Layer w0.254: v1(17.9,36.5) 18,36.4 v1(20.3,36.4) ; v1(32.7,39.2) 32.7,39.402 33,39.702 v1(33,41.5)
GPIO4: H2.6 LED2.C U3.13 | length 21.2
  Top Layer w0.254: H2.6 10.509,53.731 18.658,53.731 23,49.389 23,48.252 ; U3.13 23.973,48.252 23,48.252 ; LED2.C 24.725,44.5 23,46.225 23,48.252
GPIO5: H2.5 R19.1 U3.14 U5.2 | length 35.5
  Top Layer w0.254: U5.2@5,50.146 U5.2 5.149,49.951 7.275,49.951 ; R19.1 7.275,49.951 ; U3.14 25.851,48.374 25.1,48.374 25.1,49.289 18.649,55.74 13.821,55.74 13.181,56.38 H2.5 10.133,56.113 10.133,55.278 7.275,52.421 7.275,49.951
GPIO12: C6.1 H1.6 R11.1 SW1.3 SW1.4 U3.6 | length 86.8
  Top Layer w0.254: SW1.4 10.06,7 ; 9.963,10.1 10.06,10.002 10.06,7 ; R11.1 11.325,11.025 12.3,12 13.4,12 19.022,17.622 22.275,17.622 23.286,18.633 23.286,20.686 v1(24,21.4) ; SW1.3 10.06,7 ; H1.6 19.82,63.655 U3.6 20,59.107 23.632,55.475 24.125,55.475 v1(27.9,51.7) ; v1(24,27.6) 26.3,29.9 v1(26.3,31) ; v1(25.44,37.36) 26.96,37.36 28.6,39 28.6,44.264 28.108,44.756 28.108,45.592 v1(28,45.7)
  Top Layer w0.45: C6.1 9.963,10.1 R11.1
  Bottom Layer w0.254: v1(24,21.4) v1(24,27.6) ; v1(25.44,37.36) 25.44,31.86 v1(26.3,31) ; v1(27.9,51.7) 27.95,51.65 27.95,45.75 v1(28,45.7)
GPIO13: C7.1 H1.7 R12.1 SW2.3 SW2.4 U3.7 | length 78.8
  Top Layer w0.254: H1.7 17.28,65.92 18,65.2 U3.7 18.373,63.102 18.373,60.016 24.598,53.791 25.091,53.791 26.401,52.481 26.401,51.699 v1(26.5,51.6) ; R12.1 21.8,10 ; C7.1 21.8,10 ; v1(25.5,21.4) 24.619,20.519 24.313,20.519 23.794,20 23.794,16.897 21.8,14.903 21.8,10 ; SW2.3 SW2.4 20.65,7.899 21.8,9.049 21.8,10
  Bottom Layer w0.254: v1(25.5,21.4) 25.5,21.408 24.881,22.027 24.881,33.619 24.5,34 24.5,38.683 26.2,40.383 26.2,45.902 26.5,46.202 v1(26.5,51.6)
GPIO14: H1.5 R15.1 U3.5 U4.3 | length 56.7
  Top Layer w0.35: H1.5 22.18,68.92 22.18,63.655 U3.5 22,58.914 28.829,52.085 28.829,51.147 29.3,50.676 v1(29.3,50.5) ; v1(31.8,45.7) 31.8,41.2 32.754,40.246 48.981,40.246 51.417,40.246 51.791,40.62 51.791,41.251 U4.3 51.791,41.749 51.791,42.809 51.5,43.1 R15.1
  Bottom Layer w0.35: v1(29.3,50.5) 31.8,48 v1(31.8,45.7)
GPIO15: H2.9 R6.2 U3.10 | length 14.8
  Top Layer w0.254: H2.9 11.429,45.191 11.429,44.8 13.329,42.9 16,42.9 16.5,43.4 16.5,44 ; R6.2 16.5,44 ; U3.10 18,45.6 17.5,45.6 16.5,44.6 16.5,44
GPIO16: H1.4 U3.4 | length 6
  Top Layer w0.254: U3.4 24,65.1 24.9,66 H1.4
NetLED1_A: LED1.A R17.2 | length 2.4
  Top Layer w0.35: LED1.A 14.9,38.775 R17.2
NetLED2_A: LED2.A R18.2 | length 2.3
  Top Layer w0.254: R18.2 LED2.A
NetQ1_1: Q1.1 R3.2 | length 2.3
  Top Layer w0.254: Q1.1 28.989,23.414 R3.2
NetQ2_1: Q2.1 R4.2 | length 3.3
  Top Layer w0.254: R4.2 24.8,27.154 25.035,27.389 Q2.1
NetR1_2: R1.2 USB1.A5 | length 3.9
  Top Layer w0.254: USB1.A5@7.775,23.25 10.575,23.25 R1.2
NetR2_2: R2.2 USB1.B5 | length 4
  Top Layer w0.254: USB1.B5 9.264,20.25 9.514,20 R2.2
RTS: C8.1 Q2.2 R3.1 R13.1 SW3.3 SW3.4 U2.14 U3.1 | length 84.6
  Top Layer w0.254: U2.14 23.395,25.405 24,24.8 27.732,24.8 27.737,24.805 ; Q2.2 26.796,25.599 27.737,25.599 ; R3.1 26.837,23.588 27.737,23.588 ; v1(27.5,31.6) 27.5,29.067 27.737,28.831 27.737,25.599 ; U3.1 30,51.764 31.389,50.375 31.389,46.535 30.919,46.065 30.919,45.335 31.164,45.09 31.164,38.392 31.043,38.27 31.043,37.743 v1(30.9,37.6) ; C8.1 30.45,8.3 32.551,8.3 32.7,8.151 32.7,7.05 SW3.4 33.999,7 ; R13.1 33.966,10 ; SW3.3 33.999,7 ; 27.737,23.588 27.737,24.805 ; 27.737,23.588 27.737,22.689 28.1,22.325 28.1,20.687 27.813,20.4 27.498,20.4 27.211,20.113 27.211,11.989 29.2,10 33.966,10 ; 27.737,24.805 27.737,25.599 ; 33.966,10 33.966,7.033 33.999,7
  Bottom Layer w0.254: v1(27.5,31.6) 28.381,32.481 28.381,35.081 v1(30.9,37.6)
RXD0: H2.4 R9.1 U3.15 | length 27.6
  Top Layer w0.254: H2.4 10.778,58.92 11.418,58.28 13.281,58.28 13.83,57.731 18.405,57.731 25.925,50.211 26.178,50.211 27,49.389 27,48.166 ; R9.1 27.6,44.8 27.081,45.319 27.081,46.702 27,46.783 27,48.166 ; U3.15 27.941,48.166 27,48.166
TXD0: H2.3 R8.1 U3.16 | length 30.8
  Top Layer w0.254: H2.3 12.129,59.731 17.123,59.731 26.135,50.719 27.67,50.719 29,49.389 29,48.137 ; R8.1 29.7,44.7 29,45.4 29,48.137 ; U3.16 29.088,48.225 29,48.137
USB_D+: U2.5 USB1.A6 USB1.B6 | length 16.5
  Top Layer w0.254: USB1.B6 6.281,21.25 5.904,20.873 5.157,20.873 4.673,21.357 4.673,22.043 5.157,22.527 5.954,22.527 6.231,22.25 15.79,22.25 16.405,22.865 U2.5
USB_D-: U2.6 USB1.A7 USB1.B7 | length 15.4
  Top Layer w0.254: v3(5.5,21.7) 5.527,21.727 7.452,21.727 USB1.A7 11.984,21.75 12.138,21.595 14.444,21.595 14.571,21.595 14.772,21.796 15.026,21.796 15.227,21.595 15.5,21.595 U2.6 ; v3(5.5,23.4) 5.643,23.257 6.28,23.257 6.765,22.773 7.452,22.773 USB1.B7
  Bottom Layer w0.254: v3(5.5,21.7) v3(5.5,23.4)
WiFiEnable: Q2.3 R5.1 U3.3 | length 43.7
  Top Layer w0.254: U3.3 26,55.7 29.385,52.315 29.385,51.661 30.4,50.646 30.4,50.3 30.881,49.819 30.881,46.942 30.411,46.472 30.411,44.528 30.656,44.283 30.656,38.602 29.354,37.3 v1(29.2,37.3) ; v1(27.5,32.9) 28.436,31.964 28.436,28.498 29.657,27.277 ; Q2.3 28.88,26.5 29.657,27.277 ; R5.1 29.9,27.521 29.657,27.277
  Bottom Layer w0.254: v1(27.5,32.9) 27.5,35.4 29.2,37.1 v1(29.2,37.3)
pads on no net: TP1.TP TP2.TP TP3.TP TP4.TP U1.4 U2.7 U2.8 U2.9 U2.10 U2.11 U2.12 U2.15 U3.17 U3.18 U3.19 U3.20 U3.21 U3.22 U5.3 USB1.A8 USB1.B8

## Polygon pours and split planes (outlines as drawn)
GND on Bottom Layer "Bottom Layer-GND" (solid, remove dead copper, pour order 2): 0.1,80.1 60,80.1 60,0 0,0 -0.1,0.1
GND on Top Layer "GND_L01_P000" (solid, remove dead copper, pour order 0): 0,80.1 0,0 60.1,0 60,0.1 60,80

## Other copper
Top Layer:
  pour cut-out: 32.5,64 32.5,47.8 38.5,47.8 38.5,64
Bottom Layer:
  pour cut-out: 32.5,64 32.5,47.8 32.6,47.7 38.5,47.7 38.5,64

## Silkscreen, mask and mechanical layers (free items; w line width, h text height)
Mechanical 1:
  the board outline again, w0.254

## Text inside footprints (layer, text, board x,y; h text height)
U3: Mechanical 13 "ANTENNA AREA" at 37.874,63.723 h0.25 r270; Mechanical 13 "CUTOUT POLYGON" at 37.366,63.723 h0.25 r270
USB1: Mechanical 13 "PCB EDGE" at 0.2,15.5 h1.02 r270